# EAGLE board MICRO_MODULAR (EAGLE 7.6.0)
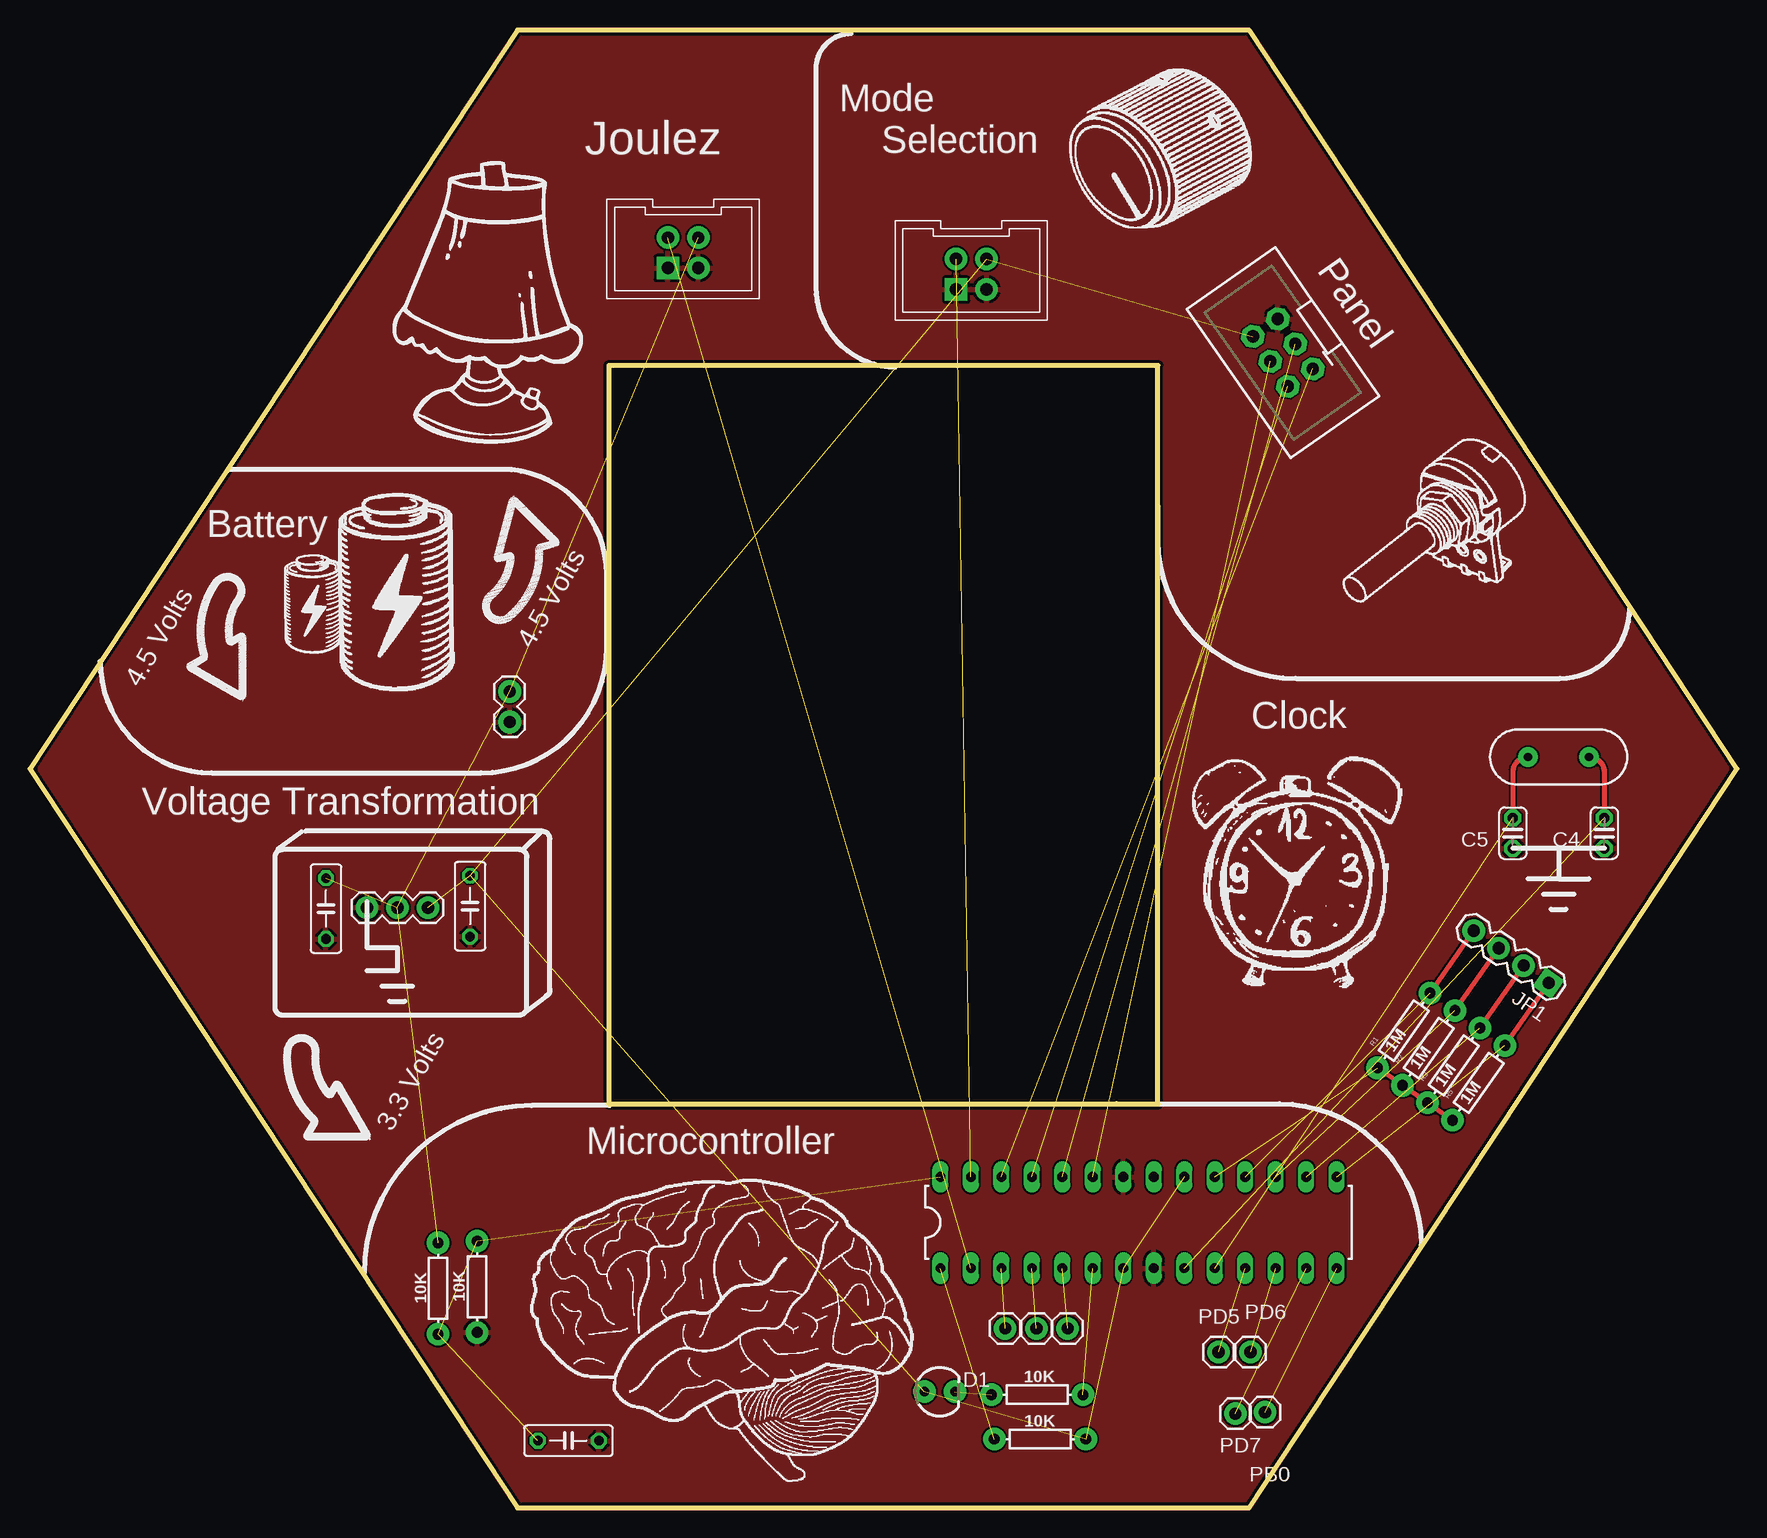
[diagram p0: board, top side]
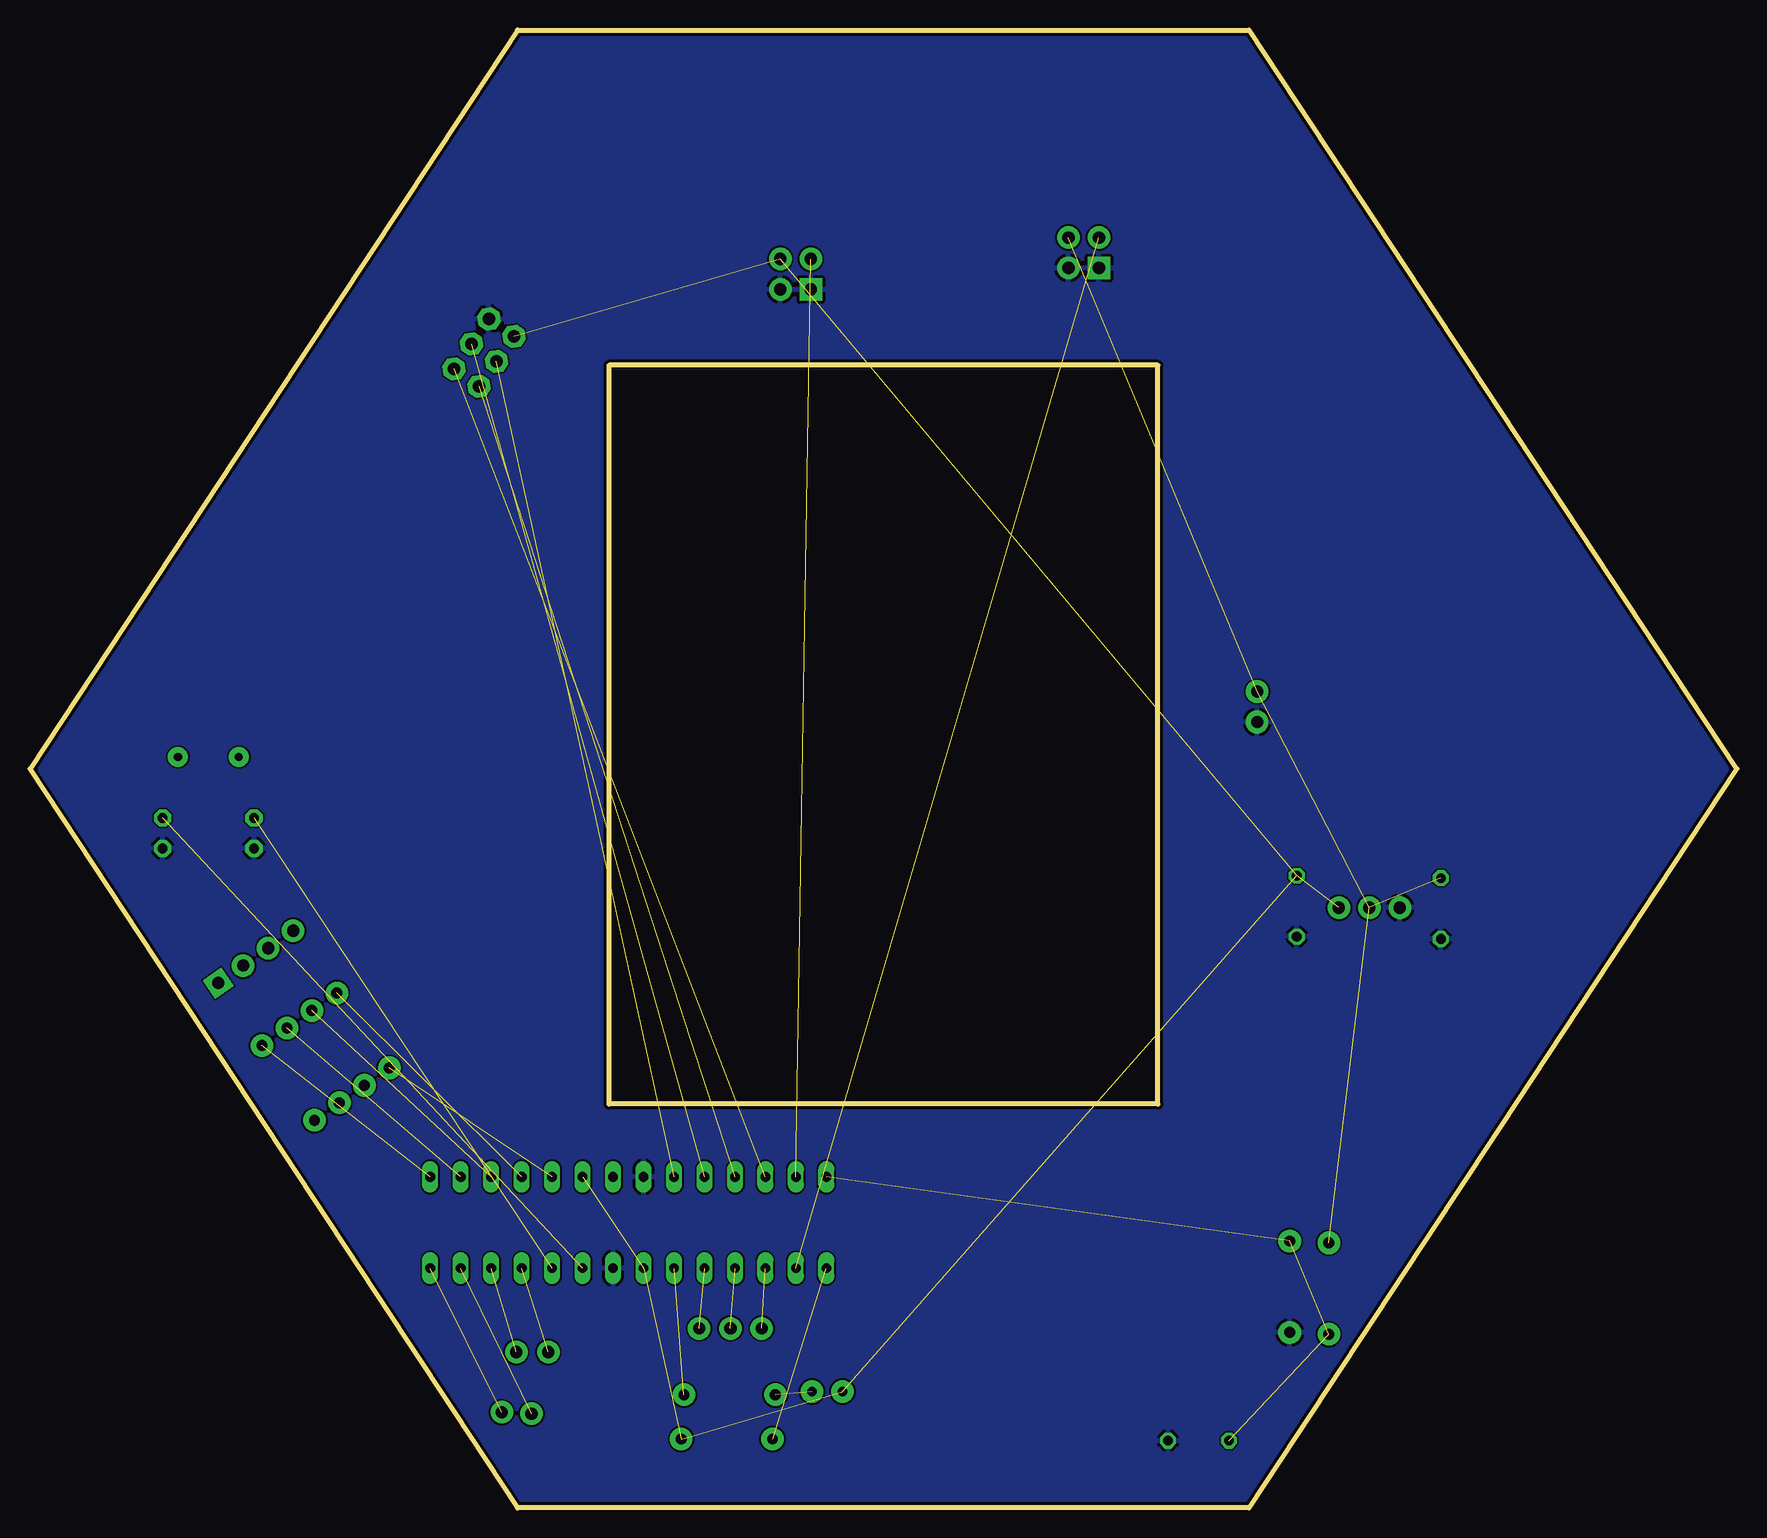
[diagram p1: board, bottom side, seen from below]

Size 142.24 x 123.19 mm. Coordinates in mm from the lower left corner, seen from the top.
Outline: 40.64,0 101.6,0 142.24,61.59 101.6,123.19 40.64,123.19 0,61.59 40.64,0
Outline: 48.26,33.66 93.98,33.66 93.98,95.25 48.26,95.25 48.26,33.66
Copper layers (1*16): Top 0.035mm / dielectric 1.5mm / Bottom 0.035mm
Design rules "seeedstudio_2l": minimum track width 6mil, minimum drill 12mil, track to track 6mil, track to pad 6mil, pad to pad 6mil, via to via 6mil, smd to smd 0mil, copper to edge 10mil, drill to drill 10mil, minimum pad ring 10mil, minimum via ring 6mil, stop-mask expansion 2mil, vias tented up to drill 100mil, thermal gap 10mil
Net classes: 0 default: width 0.254 mm

## Footprints (pad centres in the part's own frame; a part is rotated, then mirrored left to right if it is on the bottom)
DIL-28-3 = drill 0.813 long: 1 -16.51,-3.81; 2 -13.97,-3.81; 3 -11.43,-3.81; 4 -8.89,-3.81; 5 -6.35,-3.81; 6 -3.81,-3.81; 7 -1.27,-3.81; 8 1.27,-3.81; 9 3.81,-3.81; 10 6.35,-3.81; 11 8.89,-3.81; 12 11.43,-3.81; 13 13.97,-3.81; 14 16.51,-3.81; 15 16.51,3.81; 16 13.97,3.81; 17 11.43,3.81; 18 8.89,3.81; 19 6.35,3.81; 20 3.81,3.81; 21 1.27,3.81; 22 -1.27,3.81; 23 -3.81,3.81; 24 -6.35,3.81; 25 -8.89,3.81; 26 -11.43,3.81; 27 -13.97,3.81; 28 -16.51,3.81
C050-025X075 = drill 0.813 octagon: 1 -2.54,0; 2 2.54,0
C025-024X044 = drill 0.813 pad 1.422 octagon: 1 -1.27,0; 2 1.27,0
HC49US = drill 0.7 pad 1.651: 1 -2.54,0; 2 2.54,0
LED3MM = drill 0.813 pad 1.88: A -1.27,0; K 1.27,0
1X04 = drill 1.016 pad 1.88 square: 1 0,0 | drill 1.016 pad 1.88: 2 2.54,0; 3 5.08,0; 4 7.62,0
2X2 = drill 1.016 pad 1.88 square: PIN1 0,-2.54 | drill 1.016 pad 1.88: PIN2 0,0; PIN3 2.54,0; PIN4 2.54,-2.54
1X03 = drill 1.016 pad 1.88: 1 0,0; 2 2.54,0; 3 5.08,0
1X02 = drill 1.016 pad 1.88: 1 0,0; 2 2.54,0
2X3-SHROUDED = drill 1.016 pad 1.88 octagon: 1 -1.27,2.54; 2 1.27,2.54; 3 -1.27,0; 4 1.27,0; 5 -1.27,-2.54; 6 1.27,-2.54
1X01 = drill 1.016 pad 1.88: 1 0,0
AXIAL-0.3 = drill 0.9 pad 1.88: P$1 -3.81,0; P$2 3.81,0

## Placement (x,y rotation side)
BRAIN  ATMEGA328P_PDIP  [DIL-28-3]  92.38,23.78 0 top
C1  1uF  [C050-025X075]  36.67,50.15 270 top
C2  1uF  [C050-025X075]  24.66,49.95 270 top
C4  22pF  [C025-024X044]  131.19,56.24 270 top
C5  22pF  [C025-024X044]  123.57,56.24 270 top
C6  1u  [C050-025X075]  44.87,5.6 0 top
CRYSTAL  [HC49US]  127.38,62.59 0 top
D1  [LED3MM]  75.81,9.69 0 top
JP1  [1X04]  126.55,43.74 145 top
LED  M2X2  [2X2]  53.16,105.89 0 top
LED1  M2X2  [2X2]  77.17,104.1 0 top
MCP1700  [1X03]  33.16,50.03 180 top
ON_OFF  [1X02]  39.98,65.5 90 top
PANEL  [2X3-SHROUDED]  104.41,96.29 215 top
PB0  [1X01]  102.92,7.97 0 top
PD1  [1X01]  81.27,14.96 0 top
PD2  [1X01]  83.87,14.96 0 top
PD3  [1X01]  86.47,14.96 0 top
PD5  [1X01]  99.05,12.99 0 top
PD6  [1X01]  101.71,12.99 0 top
PD7  [1X01]  100.44,7.84 0 top
R1  1M  [AXIAL-0.3]  114.48,39.79 55 top
R2  1M  [AXIAL-0.3]  116.56,38.33 55 top
R3  1M  [AXIAL-0.3]  118.64,36.88 55 top
R4  10K  [AXIAL-0.3]  84.17,5.73 0 top
R5  1M  [AXIAL-0.3]  120.73,35.42 55 top
R6  10K  [AXIAL-0.3]  34,18.28 270 top
R7  10K  [AXIAL-0.3]  37.26,18.43 270 top
R8  10K  [AXIAL-0.3]  83.93,9.43 180 top

## Library data of the parts
BRAIN LED LED1 = RodrigoMarques_Parts
C1 C2 C4-C6 = adafruit
CRYSTAL = SparkFun-FreqCtrl
D1 = SparkFun-LED
JP1 MCP1700 ON_OFF PB0 PD1-PD3 PD5-PD7 = SparkFun-Connectors
PANEL = SparkFun-Connectors; PROD_ID: CONN-10681
R1-R8 = SparkFun-Passives

## Nets
BLUE_BRAIN: BRAIN.25 PANEL.2
GND: BRAIN.8 BRAIN.22 C1.2 C2.2 C4.2 C5.2 C6.2 LED1.PIN1 LED1.PIN4 LED.PIN1 LED.PIN4 MCP1700.3 ON_OFF.1 PANEL.5 R7.P$2
GREEN_BRAIN: BRAIN.24 PANEL.3
LEDS_BRAIN: BRAIN.2 LED.PIN2
N$1: BRAIN.28 C6.1 R6.P$2 R7.P$1
N$2: BRAIN.15 JP1.1 R5.P$2
N$3: BRAIN.16 JP1.2 R3.P$2
N$4: BRAIN.17 JP1.3 R2.P$2
N$5: BRAIN.18 JP1.4 R1.P$2
N$6: BRAIN.19 R1.P$1 R2.P$1 R3.P$1 R5.P$1
N$7: BRAIN.9 C4.1 CRYSTAL.2
N$8: BRAIN.10 C5.1 CRYSTAL.1
N$9: BRAIN.5 PD3.1
N$10: D1.K R8.P$2
N$11: BRAIN.6 R8.P$1
N$12: BRAIN.4 PD2.1
N$13: BRAIN.27 LED1.PIN2
N$14: BRAIN.12 PD6.1
N$15: BRAIN.13 PD7.1
N$16: BRAIN.14 PB0.1
N$17: BRAIN.3 PD1.1
N$18: BRAIN.11 PD5.1
RED_BRAIN: BRAIN.26 PANEL.1
RST: BRAIN.1 R4.P$1
SPEED_BRAIN: BRAIN.23 PANEL.4
SWITCH_BRAIN: C2.1 LED.PIN3 MCP1700.2 ON_OFF.2 R6.P$1
V_5V: BRAIN.7 BRAIN.20 C1.1 D1.A LED1.PIN3 MCP1700.1 PANEL.6 R4.P$2

## Tracks (layer width: path | path; a pad name or v marks a point on that pad's centre or on a via)
BLUE_BRAIN  (1 unrouted)
GND
  pour Top: -12.7,130.81 -12.7,-3.81 181.61,-3.81 181.61,130.81
  pour Bottom: -6.35,132.08 -6.35,-7.62 160.02,-7.62 160.02,132.08
GREEN_BRAIN  (1 unrouted)
LEDS_BRAIN  (1 unrouted)
N$1  (3 unrouted)
N$2  (1 unrouted)
  Top 0.406: JP1.1 R5.P$2
N$3  (1 unrouted)
  Top 0.406: JP1.2 R3.P$2
N$4  (1 unrouted)
  Top 0.406: JP1.3 R2.P$2
N$5  (1 unrouted)
  Top 0.406: JP1.4 R1.P$2
N$6  (1 unrouted)
  Top 0.406: R5.P$1 R3.P$1 R2.P$1 R1.P$1
N$7  (1 unrouted)
  Top 0.406: CRYSTAL.2 arc-90 131.19,61.32 C4.1
N$8  (1 unrouted)
  Top 0.406: CRYSTAL.1 arc90 123.57,61.32 C5.1
N$9  (1 unrouted)
N$10  (1 unrouted)
N$11  (1 unrouted)
N$12  (1 unrouted)
N$13  (1 unrouted)
N$14  (1 unrouted)
N$15  (1 unrouted)
N$16  (1 unrouted)
N$17  (1 unrouted)
N$18  (1 unrouted)
RED_BRAIN  (1 unrouted)
RST  (1 unrouted)
SPEED_BRAIN  (1 unrouted)
SWITCH_BRAIN  (4 unrouted)
V_5V  (7 unrouted)

## Text on the board
tPlace: Mode / Selection | Panel | Battery | 4.5 Volts | 4.5 Volts | Voltage Transformation | 3.3 Volts | Microcontroller
tNames: Joulez | Clock